# EAGLE board xxx (EAGLE 7.7.0)
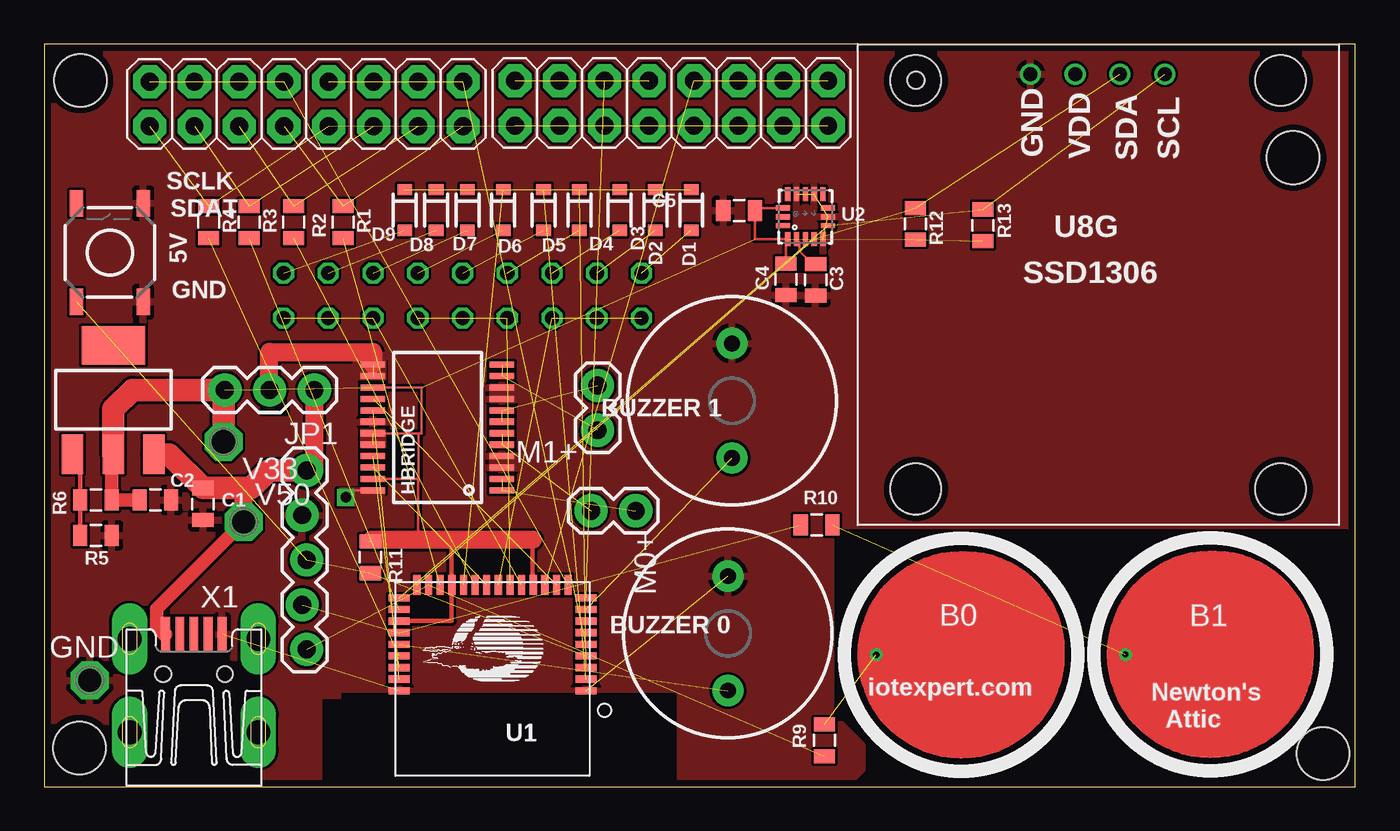
[diagram p0: board, top side]
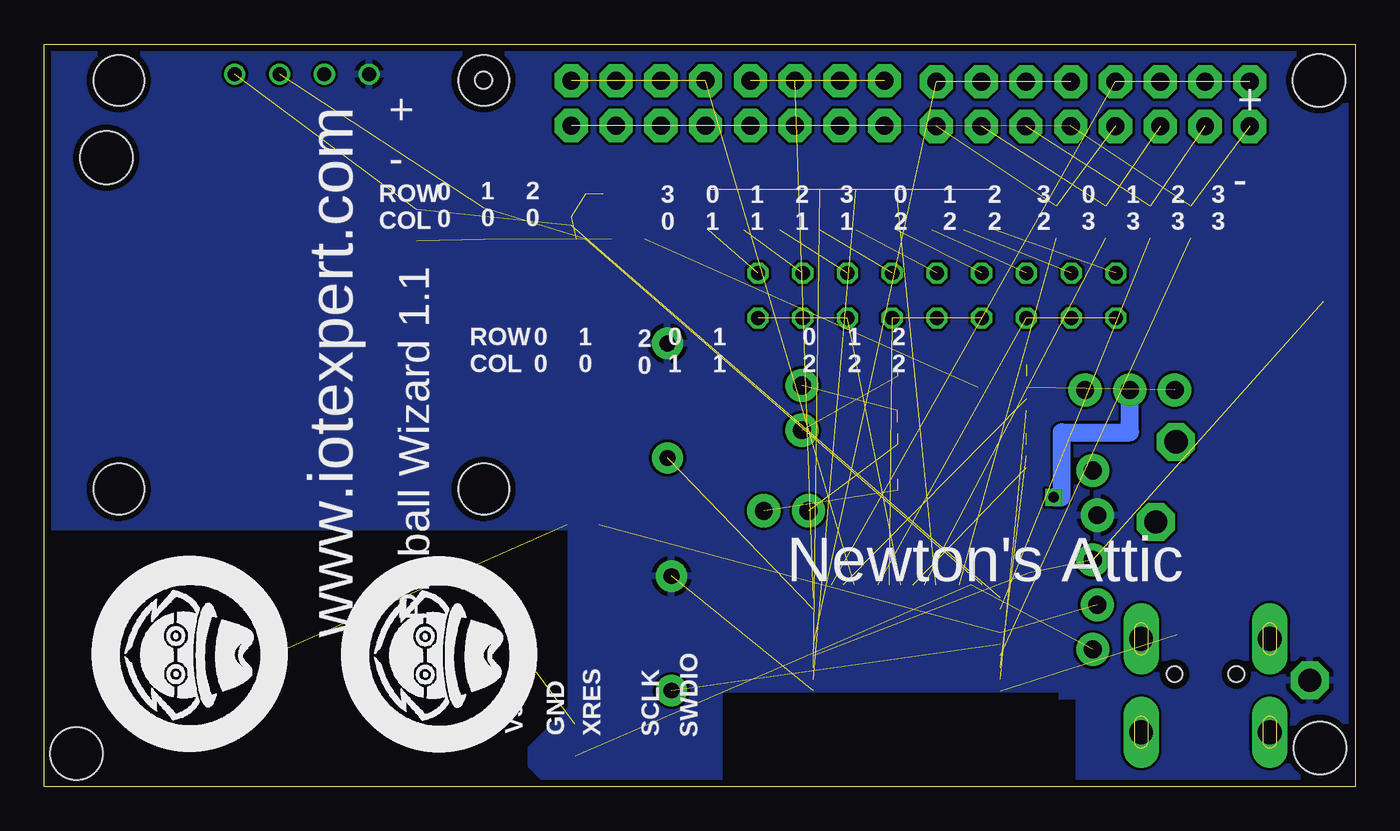
[diagram p1: board, bottom side, seen from below]

Size 74.42 x 42.16 mm. Coordinates in mm from the lower left corner, seen from the top.
Outline: 0,0 74.42,0 74.42,42.16 0,42.16 0,0
Copper layers (1*16): Top 0.0356mm / dielectric 1.5011mm / Bottom 0.0356mm
Design rules "LaenPCBOrder *": minimum track width 6mil, minimum drill 13mil, track to track 6mil, track to pad 6mil, pad to pad 6mil, via to via 6mil, smd to smd 6mil, copper to edge 15mil, drill to drill 6mil, minimum pad ring 7mil, minimum via ring 7mil, stop-mask expansion 3mil, vias tented up to drill 30mil, thermal gap 10mil
Net classes: 1 power: width 1.016 mm
Holes 3 mm at 2.06,40.11 2.01,2.21 72.59,1.88 70.89,35.71
tRestrict: area 16.9,-3.7 to 35.9,5.3; area 12.3,21.1 to 13.9,22.8
bRestrict: area 16.9,-3.7 to 35.9,5.3

## Footprints (pad centres in the part's own frame; a part is rotated, then mirrored left to right if it is on the bottom)
BUZZER-12MM = drill 0.9 pad 1.778: + 3.25,0; - -3.25,0
BUTTON_PASSIVE_12MM = drill 0.356: BUTTON 0,4.826
2X8 = drill 1.016 pad 1.88 octagon: 1 0,0; 2 0,2.54; 3 2.54,0; 4 2.54,2.54; 5 5.08,0; 6 5.08,2.54; 7 7.62,0; 8 7.62,2.54; 9 10.16,0; 10 10.16,2.54; 11 12.7,0; 12 12.7,2.54; 13 15.24,0; 14 15.24,2.54; 15 17.78,0; 16 17.78,2.54
0805 = smd 0.8 x 1.2: 1 -0.9,0; 2 0.9,0
SOD-323 = smd 0.63 x 0.83: A 1.15,0; C -1.15,0
P1-13 = drill 1.321 pad 2.159 octagon: TP 0,0
SSOP24 = smd 0.348 x 1.397: 1 -3.575,-3.656; 2 -2.925,-3.656; 3 -2.275,-3.656; 4 -1.625,-3.656; 5 -0.975,-3.656; 6 -0.325,-3.656; 7 0.325,-3.656; 8 0.975,-3.656; 9 1.625,-3.656; 10 2.275,-3.656; 11 2.925,-3.656; 12 3.575,-3.656; 13 3.575,3.656; 14 2.925,3.656; 15 2.275,3.656; 16 1.625,3.656; 17 0.975,3.656; 18 0.325,3.656; 19 -0.325,3.656; 20 -0.975,3.656; 21 -1.625,3.656; 22 -2.275,3.656; 23 -2.925,3.656; 24 -3.575,3.656
1X03 = drill 1.016 pad 1.88: 1 0,0; 2 2.54,0; 3 5.08,0
1X05_LOCK = drill 1.016 pad 1.88: 1 0,0.127; 2 2.54,-0.127; 3 5.08,0.127; 4 7.62,-0.127; 5 10.16,0.127
1X02 = drill 1.016 pad 1.88: 1 0,0; 2 2.54,0
TACTILE-SWITCH-SMD = smd 1.524 x 0.762: 1 -2.794,1.905; 2 2.794,1.905; 3 -2.794,-1.905; 4 2.794,-1.905
PSOC-BLE-11MM-32 = smd 1.2 x 0.41: 1 5.31,0.67; 2 5.31,0.01; 3 5.31,-0.65; 4 5.31,-1.31; 5 5.31,-1.97; 6 5.31,-2.63; 7 5.31,-3.29; 8 5.31,-3.95; 9 5.31,-4.61; 24 -5.31,-4.61; 25 -5.31,-3.95; 26 -5.31,-3.29; 27 -5.31,-2.63; 28 -5.31,-1.97; 29 -5.31,-1.31; 30 -5.31,-0.65; 31 -5.31,0.01; 32 -5.31,0.67 | smd 0.41 x 1.15: 10 4.29,-5.335; 11 3.63,-5.335; 12 2.97,-5.335; 13 2.31,-5.335; 14 1.65,-5.335; 15 0.99,-5.335; 16 0.33,-5.335; 17 -0.33,-5.335; 18 -0.99,-5.335; 19 -1.65,-5.335; 20 -2.31,-5.335; 21 -2.97,-5.335; 22 -3.63,-5.335; 23 -4.29,-5.335
QFN-16_0.5MM = smd 0.8 x 0.3: 1 -1.275,1; 2 -1.275,0.5; 3 -1.275,0; 4 -1.275,-0.5; 5 -1.275,-1; 9 1.275,-1; 10 1.275,-0.5; 11 1.275,0; 12 1.275,0.5; 13 1.275,1 | smd 0.3 x 0.8: 6 -0.5,-1.275; 7 0,-1.275; 8 0.5,-1.275; 14 0.5,1.275; 15 0,1.275; 16 -0.5,1.275
SOT223 = smd 1.219 x 2.235: 1 -2.311,-3.099; 2 0,-3.099; 3 2.311,-3.099 | smd 3.6 x 2.2: 4 0,3.099
9X2 = drill 0.8 octagon: P$1 0,0; P$2 0,2.54; P$3 0,5.08; P$4 0,7.62; P$5 0,10.16; P$6 0,12.7; P$7 0,15.24; P$8 0,17.78; P$9 0,20.32; P$10 2.54,20.32; P$11 2.54,17.78; P$12 2.54,15.24; P$13 2.54,12.7; P$14 2.54,10.16; P$15 2.54,7.62; P$16 2.54,5.08; P$17 2.54,2.54; P$18 2.54,0
096-SSD1306 = drill 0.8: GND 9.8,25.6; SCL 14.88,25.6; SDA 17.42,25.6; VDD 12.34,25.6 | hole 2.88: 3.3,2.05; 24,2.05; 24,25.25; 3.3,25.25 | hole 1: 3.3,25.25
UX60-MB-5S8 = smd 2 x 0.5: 1 8.65,1.6; 2 8.65,0.8; 3 8.65,0; 4 8.65,-0.8; 5 8.65,-1.6 | drill 1.35 long: M1 3.1,-3.65; M2 3.1,3.65; M3 8.4,3.65; M4 8.4,-3.65 | hole 0.9: 6.4,-1.75; 6.4,1.75

## Placement (x,y rotation side)
1  BUZZERPTH  [BUZZER-12MM]  39.04,21.92 90 top
B0  [BUTTON_PASSIVE_12MM]  52.04,7.49 90 top
B1  [BUTTON_PASSIVE_12MM]  66.19,7.52 90 top
BANK0  M08X2  [2X8]  23.77,40.03 180 top
C1  0.1uF  [0805]  9.02,16.05 90 top
C2  1uF  [0805]  6.32,16.28 180 top
C3  0.1uF  [0805]  43.79,28.78 270 top
C4  0.1uF  [0805]  42.11,28.8 270 top
C5  4.7uF  [0805]  39.45,32.72 180 top
D1  [SOD-323]  36.73,32.74 270 top
D2  [SOD-323]  34.7,32.74 270 top
D3  [SOD-323]  32.66,32.74 270 top
D4  [SOD-323]  30.38,32.74 270 top
D5  [SOD-323]  28.35,32.74 270 top
D6  [SOD-323]  26.06,32.74 270 top
D7  [SOD-323]  24.03,32.74 270 top
D8  [SOD-323]  22.25,32.74 270 top
D9  [SOD-323]  20.47,32.74 270 top
GND  GND  [P1-13]  2.59,6.05 0 top
HBRIDGE  TB6621FNG  [SSOP24]  22.33,20.4 90 top
JP1  [1X03]  15.34,22.53 180 top
JP3  [1X05_LOCK]  14.78,17.96 270 top
LEDBANK1  M08X2  [2X8]  44.5,40.08 180 top
M0+  m  [1X02]  31.04,15.67 0 top
M1+  M02PTH  [1X02]  31.42,22.78 270 top
R1  330  [0805]  16.97,32.05 270 top
R2  330  [0805]  14.17,32.05 270 top
R3  330  [0805]  11.63,32.05 270 top
R4  330  [0805]  9.35,32.05 270 top
R5  1.8K  [0805]  2.95,14.27 180 top
R6  1.2K  [0805]  2.95,16.28 0 top
R9  560  [0805]  44.3,2.64 90 top
R10  560  [0805]  43.84,14.86 0 top
R11  [0805]  18.52,13.03 270 top
R12  2.2K  [0805]  49.45,31.95 90 top
R13  2.2K  [0805]  53.29,31.88 270 top
S1  TAC_SWITCHSMD  [TACTILE-SWITCH-SMD]  3.73,30.33 90 top
SG1  BUZZERPTH  [BUZZER-12MM]  38.81,8.71 90 top
U1  CYBLE-014008-00  [PSOC-BLE-11MM-32]  25.45,6.12 180 top
U2  MMA8452Q  [QFN-16_0.5MM]  43.21,32.36 90 top
U4  V_REG_317SMD  [SOT223]  3.94,21.97 0 top
U$1  9X2  [9X2]  33.91,26.62 90 top
U$2  U8G-096-OLED  [096-SSD1306]  46.18,14.86 0 top
V33  PTR1PAD1-13  [P1-13]  10.19,19.58 0 top
V50  PTR1PAD1-13  [P1-13]  11.33,15.04 0 top
X1  MINI-USB-SHIELD-UX60-MB-5S8  [UX60-MB-5S8]  8.51,0 90 top

## Library data of the parts
1 SG1 = SparkFun-Electromechanical
B0 B1 = PatternAgents-TouchWidgets
BANK0 JP1 JP3 LEDBANK1 M0+ M1+ = SparkFun-Connectors
C1-C5 = SparkFun-Capacitors
D1-D9 = SparkFun-DiscreteSemi; PROD_ID: DIO-09646
GND V33 V50 = testpad
HBRIDGE R1-R4 = SparkFun
R5 R6 R9 R10 R12 R13 = SparkFun-Passives
R11 = SparkFun-Resistors
S1 = SparkFun-Electromechanical; PROD_ID: SWCH-08247
U1 = PatternAgents-Cypress
U2 = SparkFun-Sensors; PROD_ID: IC-10769
U4 = SparkFun-PowerIC
U$1 = arh
U$2 = IOTExpert
X1 = con-hirose; OC_FARNELL: unknown; OC_NEWARK: unknown

## Nets
ACCEINT: U2.11
ACCELINT: U1.27
BUZZER0: SG1.- U1.5
BUZZER1: 1.- U1.25
GND [power]: 1.+ C1.1 C2.1 C3.2 C4.2 C5.2 GND.TP HBRIDGE.3 HBRIDGE.4 HBRIDGE.9 HBRIDGE.10 HBRIDGE.18 JP3.2 R5.1 S1.3 S1.4 SG1.+ U1.1 U1.32 U2.5 U2.7 U2.10 U2.12 U$2.GND X1.5
LC0: BANK0.2 BANK0.10 LEDBANK1.2 LEDBANK1.10 R1.1
LC1: BANK0.4 BANK0.12 LEDBANK1.4 LEDBANK1.12 R2.1
LC2: BANK0.6 BANK0.14 LEDBANK1.6 LEDBANK1.14 R3.1
LC3: BANK0.8 BANK0.16 LEDBANK1.8 LEDBANK1.16 R4.1
LEDCOL0: R1.2 U1.12
LEDCOL1: R2.2 U1.15
LEDCOL2: R3.2 U1.8
LEDCOL3: R4.2 U1.4
LEDROW0: LEDBANK1.1 LEDBANK1.3 LEDBANK1.5 LEDBANK1.7 U1.21
LEDROW1: LEDBANK1.9 LEDBANK1.11 LEDBANK1.13 LEDBANK1.15 U1.24
LEDROW2: BANK0.1 BANK0.3 BANK0.5 BANK0.7 U1.28
LEDROW3: BANK0.9 BANK0.11 BANK0.13 BANK0.15 U1.23
M0L: HBRIDGE.21 U1.3
M0N: HBRIDGE.5 HBRIDGE.6 M0+.1
M0P: HBRIDGE.1 HBRIDGE.2 M0+.2
M0R: HBRIDGE.22 U1.16
M1L: HBRIDGE.16 U1.22
M1N: HBRIDGE.7 HBRIDGE.8 M1+.1
M1P: HBRIDGE.11 HBRIDGE.12 M1+.2
M1R: HBRIDGE.17 U1.2
N$1: R5.2 R6.1 U4.1
N$3: B0.BUTTON R9.2
N$10: U1.26
N$11: B1.BUTTON R10.2
N$27: C3.1 U2.2
SCL: R12.2 U1.10 U2.4 U$2.SCL
SDA: R13.1 U1.9 U2.6 U$2.SDA
SWA00: D1.A U$1.P$18
SWA01: D2.A U$1.P$17
SWA02: D3.A U$1.P$16
SWA10: D4.A U$1.P$15
SWA11: D5.A U$1.P$14
SWA12: D6.A U$1.P$13
SWA20: D7.A U$1.P$12
SWA21: D8.A U$1.P$11
SWA22: D9.A U$1.P$10
SWCOL0: D1.C D4.C D7.C U1.30
SWCOL1: D2.C D5.C D8.C U1.31
SWCOL2: D3.C D6.C D9.C U1.14
SWDCLK: JP3.4 R10.1 U1.6
SWDIO: JP3.5 R9.1 U1.11
SWROW0: U1.17 U$1.P$1 U$1.P$2 U$1.P$3
SWROW1: U1.18 U$1.P$4 U$1.P$5 U$1.P$6
SWROW2: U1.19 U$1.P$7 U$1.P$8 U$1.P$9
V33 [power]: C2.2 C4.1 C5.1 HBRIDGE.15 HBRIDGE.19 HBRIDGE.20 HBRIDGE.23 JP1.3 R6.2 R11.1 R12.1 R13.2 U1.7 U1.13 U1.20 U2.1 U2.14 U4.2 V33.TP
V50 [power]: C1.2 JP1.1 JP3.1 U4.3 V50.TP X1.1
VDD: U$2.VDD
VMOTOR: HBRIDGE.13 HBRIDGE.14 HBRIDGE.24 JP1.2
XRES: JP3.3 R11.2 S1.1 U1.29

## Tracks (layer width: path | path; a pad name or v marks a point on that pad's centre or on a via)
BUZZER0  (1 unrouted)
BUZZER1  (1 unrouted)
GND  (5 unrouted)
  pour Top: -0.28,42.39 -0.56,42.11 -0.56,-1.3 0.3,-0.43 15.75,-0.43 15.62,-0.3 15.62,5.08 15.72,5.18 34.85,5.18 35.03,5 35.03,-0.56 35.56,-0.03 45.42,-0.03 46.43,0.99 46.43,2.36 44.65,4.14 44.65,15.19 45.01,14.83 74.9,14.83 74.73,15.01 74.73,42.27 74.57,42.42 -0.28,42.42
  pour Bottom: -0.23,42.52 -0.61,42.14 -0.61,-0.56 -0.48,-0.43 15.62,-0.43 15.67,-0.38 15.67,5.13 35.03,5.13 35.03,-0.23 35.08,-0.18 45.39,-0.18 46.76,1.19 46.76,2.21 44.5,4.47 44.5,14.88 44.63,14.76 74.9,14.76 74.83,14.83 74.83,42.6 74.75,42.52 -0.18,42.52
  pour Top (no thermals): 25.3,17.96 27.81,17.96 27.81,18.92 25.3,18.92
  pour Top (no thermals): 25.35,21.84 27.86,21.84 27.86,22.81 25.35,22.81
LC0  (4 unrouted)
LC1  (4 unrouted)
LC2  (4 unrouted)
LC3  (4 unrouted)
LEDCOL0  (1 unrouted)
LEDCOL1  (1 unrouted)
LEDCOL2  (1 unrouted)
LEDCOL3  (1 unrouted)
LEDROW0  (4 unrouted)
LEDROW1  (4 unrouted)
LEDROW2  (4 unrouted)
LEDROW3  (4 unrouted)
M0L  (1 unrouted)
M0N  (2 unrouted)
M0P  (2 unrouted)
M0R  (1 unrouted)
M1L  (1 unrouted)
M1N  (2 unrouted)
M1P  (2 unrouted)
M1R  (1 unrouted)
N$1
  Top 0.254: R5.2 R6.1 2.05,18.45 U4.1
N$3  (1 unrouted)
N$11  (1 unrouted)
N$27
  Top 0.152: C3.1 43.6,29.68 42.88,30.4 42.88,30.91 U2.2
SCL  (3 unrouted)
SDA  (3 unrouted)
SWA00  (1 unrouted)
SWA01  (1 unrouted)
SWA02  (1 unrouted)
SWA10  (1 unrouted)
SWA11  (1 unrouted)
SWA12  (1 unrouted)
SWA20  (1 unrouted)
SWA21  (1 unrouted)
SWA22  (1 unrouted)
SWCOL0  (3 unrouted)
SWCOL1  (3 unrouted)
SWCOL2  (3 unrouted)
SWDCLK  (2 unrouted)
SWDIO  (2 unrouted)
SWROW0  (3 unrouted)
SWROW1  (3 unrouted)
SWROW2  (3 unrouted)
V33  (6 unrouted)
  Top 0.152: HBRIDGE.15 21.44,22.67 21.44,20.07 21.34,20.07 | 21.34,20.07 HBRIDGE.19 | HBRIDGE.23 21.23,17.47 | 21.23,17.47 21.23,14.02 | 21.26,17.47 21.26,20.02 21.34,20.09 21.34,20.07 | 21.26,17.47 21.26,17.37 | 21.23,17.47 21.26,17.47 | U2.14 40.35,32.86 C5.1 40.35,31.09 U2.1 42.11,31.09 C4.1
  Top 0.254: U1.20 27.74,11.46 27.74,14.02 | 23.11,14.02 23.11,11.46 U1.13 23.14,9.41 U1.7
  Top 0.762: C2.2 R6.2 3.85,18.78 U4.2
  Top 1.016: 27.74,14.02 23.11,14.02 21.23,14.02 18.59,14.02
  Top 1.27: U4.2 3.94,21.44 5.03,22.53 JP1.3 10.19,22.45 V33.TP
  pour Top (no thermals): 17.98,20.24 17.98,19.33 18.01,19.3 19.35,19.3 19.35,20.22 19.33,20.24
V50
  Top 0.762: X1.1 6.79,8.65 6.4,9.04 6.4,10.11 V50.TP
  Top 1.016: JP3.1 15.34,17.96 JP1.1 | V50.TP 11.33,16.75 11.53,16.95
  Top 1.27: U4.3 7.1,18.87 C1.2 11.53,16.95 11.75,16.95 12.75,17.96 JP3.1
VMOTOR  (via drill 0.6)  (1 unrouted)
  Top 0.152: HBRIDGE.24 17.12,16.82 v17.12,16.43
  Top 1.016: JP1.2 12.78,22.53 12.78,24.69 18.67,24.69 HBRIDGE.13
  Bottom 1.016: v17.12,16.43 16.66,16.43 16.66,20.12 12.8,20.12 JP1.2
  pour Top (no thermals): 19.38,23.14 19.38,24.64 17.6,24.64 17.58,24.61 17.58,23.16 17.6,23.14
  pour Top (no thermals): 16.79,15.98 19.3,15.98 19.3,16.94 16.79,16.94
XRES  (3 unrouted)

## Text on the board
tNames: SCLK | SDAT | 5V | GND | BUZZER 1 | BUZZER 0 | iotexpert.com | Newton's / Attic
bNames: www.iotexpert.com | + | + | - | - | 3 / 3 | 2 / 3 | 1 / 3 | 0 / 3 | 3 / 2 | 2 / 2 | 1 / 2 | 0 / 2 | 3 / 1 | 2 / 1 | 1 / 1 | 0 / 1 | 3 / 0 | 2 / 0 | 1 / 0 | 0 / 0 | ROW / COL | Pinball Wizard 1.1 | 2 / 2 | 1 / 2 | 0 / 2 | 1 / 1 | 0 / 1 | 1 / 0 | 0 / 0 | ROW / COL | 2 / 0 | Newton's Attic | SWDIO | SCLK | XRES | GND | V50